# Altium PCB OTP5.PcbDoc
Units mil, origin at the board's own origin, x right, y up, seen from the top; angles counter-clockwise.
Board outline 1426.61 x 364.86 mil, 4 copper layers (Top Layer, Internal Plane 1, Internal Plane 2, Bottom Layer), stack 30.634 mil thick; 24 components, 20 nets, 110 pads, 19 vias.
Unrouted connection lines stored in the file: 1.
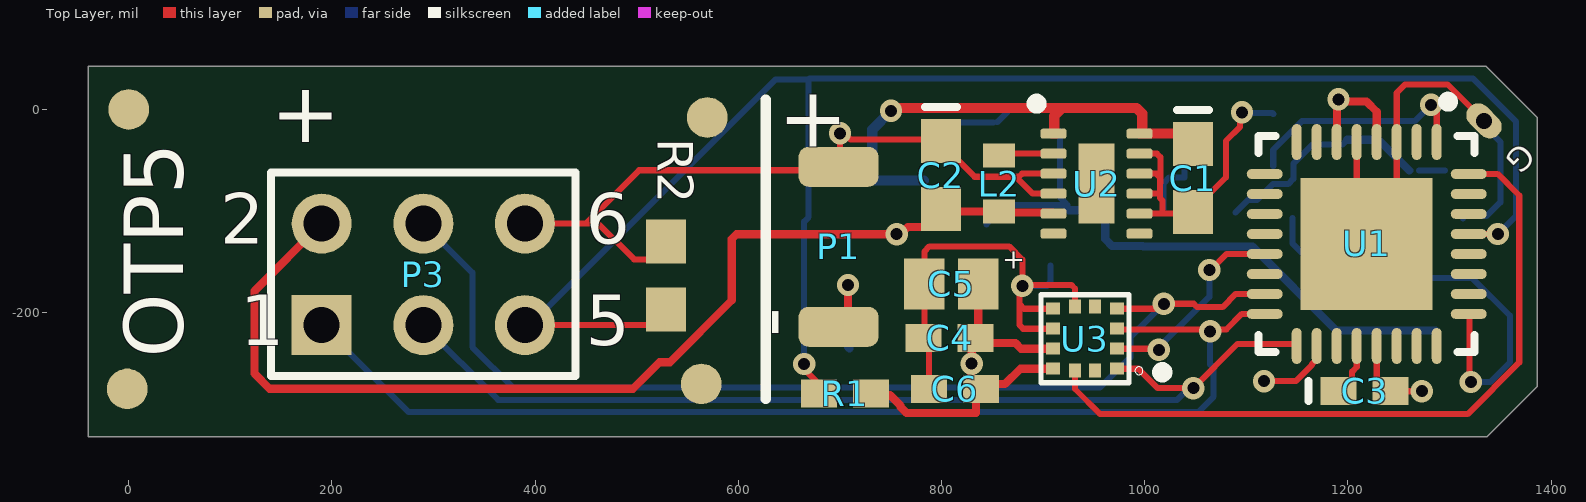
[diagram p0: Top Layer view]
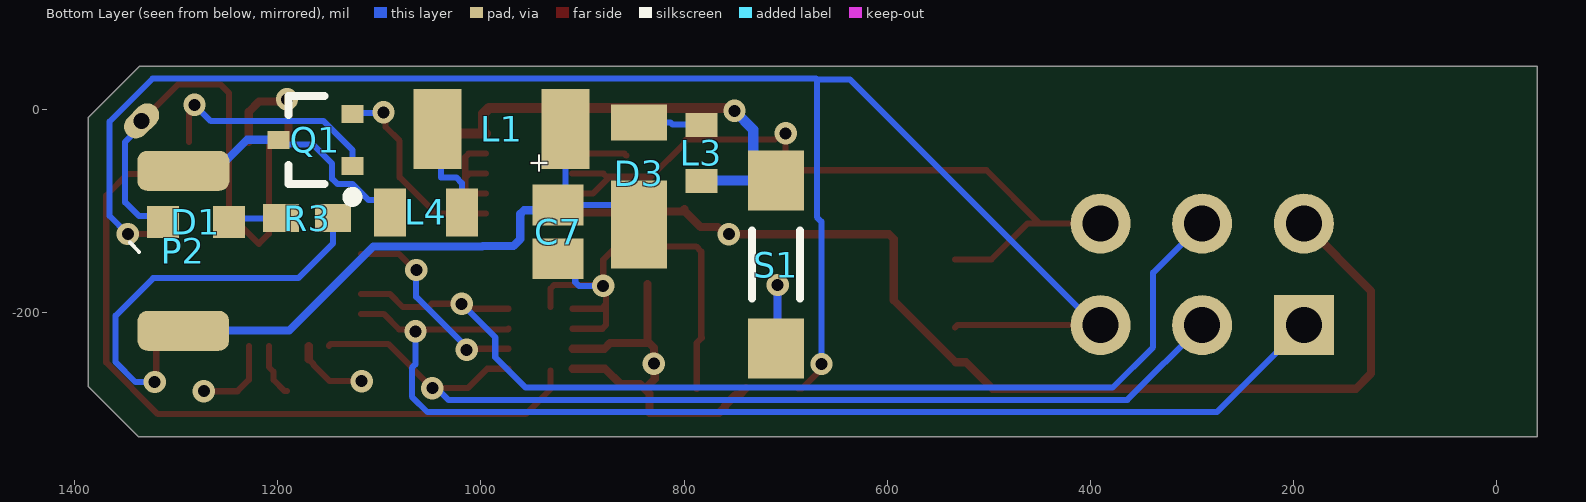
[diagram p1: Bottom Layer view, seen from below]
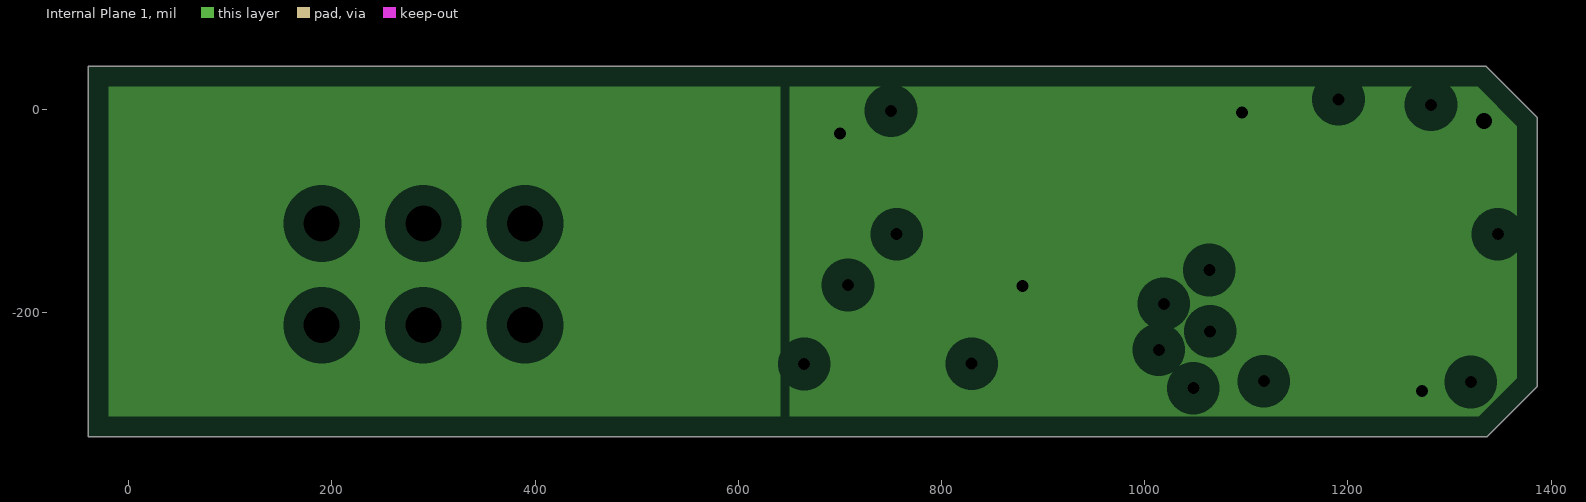
[diagram p2: Internal Plane 1, clearances drawn from the general rule]
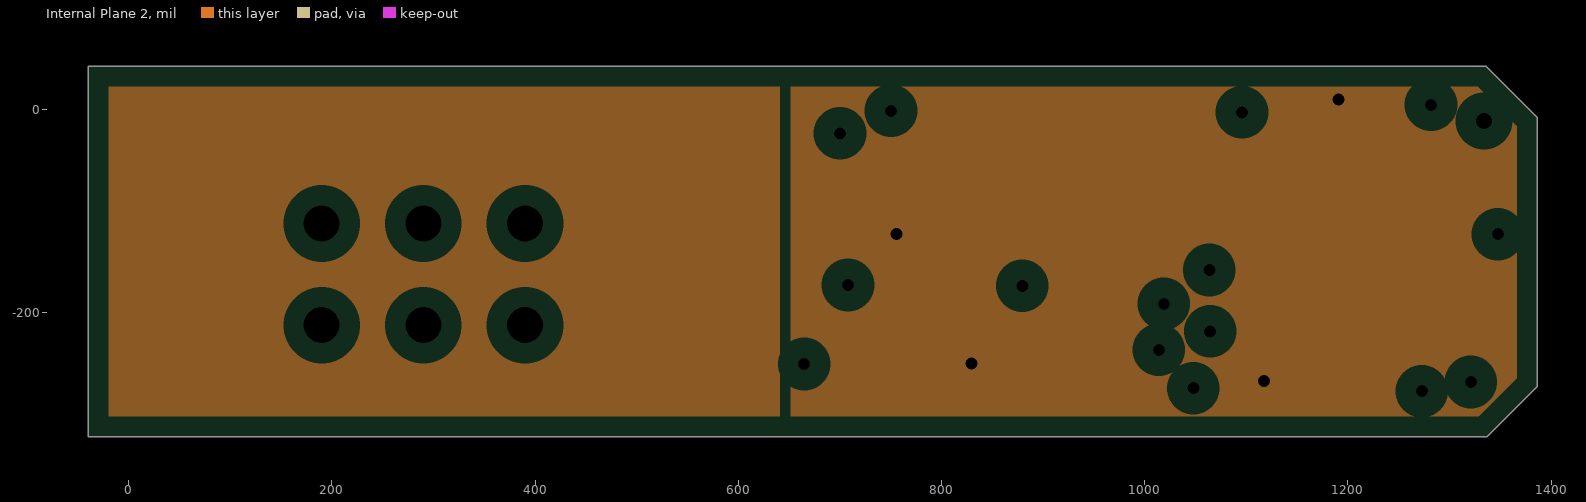
[diagram p3: Internal Plane 2, clearances drawn from the general rule]

## Layer stack, top to bottom
Top Solder: solder mask 0.4, Solder Resist, Dk 3.5
Top Layer: signal copper 1.4
Dielectric 1: core 10, FR-4, Dk 4.2
Internal Plane 1: plane copper 1.417, net GND
Dielectric 3: prepreg 5, Dk 4.2
Internal Plane 2: plane copper 1.417
Dielectric 2: core 10, Dk 4.2
Bottom Layer: signal copper 1.4
Bottom Solder: solder mask 0.4, Solder Resist, Dk 3.5

## Board outline
-40,-322.17 -40,42.69 1335.64,42.69 1386.6,-8.27 1386.6,-272.46 1337.9,-321.16 1336.71,-322.17

## Design rules (kind name [scope] priority, off if disabled: settings)
Clearance [All] p1: gap=6 ignorepadtopadclearanceinfootprint=FALSE
PlaneClearance [All] p1: clearance=20
PlaneConnect [All] p1: planeconnectstyle=Relief reliefexpansion=20 reliefentries=4 reliefconductorwidth=10 reliefairgap=10
PolygonConnect [All] p1: connectstyle=Relief reliefconductorwidth=10 reliefentries=4 polygonreliefangle="90 Angle" airgapwidth=10
RoutingVias [All] p1: holewidth=11 width=22 viastyle="Through Hole" minholewidth=8 minwidth=12 maxholewidth=28 maxwidth=50
SolderMaskExpansion [All] p1: expansion=4 istentingtop=FALSE
Width [All] p1: maxlimit=30 minlimit=6 preferedwidth=6
28 further rules are at their usual default settings.

## Components (designator, comment, footprint, x,y, rotation, side; value= is the part's Value field where it differs from the comment)
C1 "C0603" 0603 1047.51,-67.71 r270 top value=10uF
C2 "C0603" 0603 799.39,-64.62 r270 top value=10uF
C3 "0.1uF" 0402 1216.4,-277.05 r0 top
C4 "100nF" 0402 808.06,-224.75 r180 top value=100pF
C5 "10uF" Tant0805 809.6,-171.75 r0 top
C6 "100nF" 0402 813.1,-275.08 r180 top value=100pF
C7 "47uF" Tant0805 923.99,-120.57 r90 bottom value=10uF
D1 "LED_0603" Diode0603 1280.51,-110.82 r0 bottom
D3 "Shottky" DFLS130 844.27,-77.78 r90 bottom
L1 "100uH" Inductor_NLV32T 979.61,-19.39 r0 bottom
L2 "2.2uH" "Inductor KLZ1608AHR" 856.78,-73.01 r90 top
L3 "47uH" "Inductor KLZ1608AHR" 782.93,-42.82 r90 bottom
L4 "27uH" "Inductor MLZ2012M220WT000" 1054.03,-101.39 r0 bottom
P1 "PIEZO" PIEZO#1 698.63,-56.43 r180 top
P2 "PIEZO" PIEZO#2 1292.81,-217.91 r180 bottom
P3 "AVR SPI" HDR2X3 190,-212.31 r0 top
Q1 "PMF250XN,115" NXP-SOT323_N 1162.93,-30.04 r0 bottom
R1 "10k" 2-0402 704.97,-279.78 r0 top
R2 "omit" 3-0603 529.05,-163.44 r90 top
R3 "330" 2-0402 1171.03,-107.03 r180 bottom
S1 "Reed_MK24" "Reed MK24-B-3" 709.32,-152.67 r90 bottom
U1 "ATmega8-16AC" 32M1-A_M 1218.54,-132.36 r270 top
U2 "TPS62740" TPS6274x 910.27,-23.8 r0 top
U3 "LIS2DS12" LGA-12 972.71,-255.23 r180 top

## Footprints (in the part's own frame and the unit in brackets; to place one, negate y for a bottom-side part, rotate by r counter-clockwise, add the part's x,y. Pads: shape width x height; smd on the part's side, far side on the other; paste and mask are expansions set on the pad)
2-0402 [mm] "Chip Resistor; Body 1 x 0.5 mm (LxW typ)"
  rect 0.9x0.7 smd: 1(-0.65,0) 2(0.65,0)
3-0603 [mm] "Chip Resistor; Body 1.6 x 0.9 mm (LxW typ)"
  rect 1.1x1 smd: 1(-0.85,0) 2(0.85,0)
32M1-A_M [mm] "QFN, 32-Leads, Body 5x5mm, Pitch 0.5mm, Thermal Pad 3.3x3.3mm, IPC Low Density"
  oval 0.9x0.25 smd: 1(-2.55,1.75) 2(-2.55,1.25) 3(-2.55,0.75) 4(-2.55,0.25) 5(-2.55,-0.25) 6(-2.55,-0.75) 7(-2.55,-1.25) 8(-2.55,-1.75) 17(2.55,-1.75) 18(2.55,-1.25) 19(2.55,-0.75) 20(2.55,-0.25) 21(2.55,0.25) 22(2.55,0.75) 23(2.55,1.25) 24(2.55,1.75)
  oval 0.25x0.9 smd: 9(-1.75,-2.55) 10(-1.25,-2.55) 11(-0.75,-2.55) 12(-0.25,-2.55) 13(0.25,-2.55) 14(0.75,-2.55) 15(1.25,-2.55) 16(1.75,-2.55) 25(1.75,2.55) 26(1.25,2.55) 27(0.75,2.55) 28(0.25,2.55) 29(-0.25,2.55) 30(-0.75,2.55) 31(-1.25,2.55) 32(-1.75,2.55)
  rect 3.3x3.3 smd paste-1.2: 33(0,0)
  silkscreen extent -3.68,-2.7 2.7,2.7, body extent -2.55,-2.55 2.55,2.55, height 1
0402 [mm] "Chip Capacitor; Body 1.0 x 0.5 mm (LxW typ)"
  rect 0.9x0.7 smd: 1(-0.65,0) 2(0.65,0)
  silkscreen extent -1.4,-0.25 -1.4,0.25
0603 [mm] "Chip Capacitor; Body 1.6 x 0.8 mm (LxW typ)"
  rect 1.1x1 smd: 1(-0.85,0) 2(0.85,0)
  silkscreen extent -1.7,-0.4 -1.7,0.4
DFLS130 [mm] "Diode"
  rect 0.9x1.4 smd: A(1.65,0)
  rect 2.2x1.4 smd: K(-0.9,0)
Diode0603 [mm]
  rect 0.8x0.8 smd: A(-0.825,0) K(0.825,0)
  silkscreen extent 1.42,0.51 1.65,0.74
HDR2X3 [mm] "Connector; Header; 3x2 Position"
  rect 1.5x1.5 hole 0.9: 1(0,0)
  round 1.5 hole 0.9: 2(0,2.54) 3(2.54,0) 4(2.54,2.54) 5(5.08,0) 6(5.08,2.54)
  silkscreen extent -1.27,-1.27 6.35,3.81
"Inductor KLZ1608AHR" [mm]
  rect 0.6x0.8 smd: 1(-0.7,0) 2(0.7,0)
"Inductor MLZ2012M220WT000" [mm]
  rect 0.8x1.2 smd: 1(-0.9,0) 2(0.9,0)
Inductor_NLV32T [mm]
  rect 1.2x2 smd: 1(-1.6,0) 2(1.6,0)
LGA-12 [mm] "LIS2DS12"
  rect 0.35x0.3 smd: 1(0,0) 2(0,-0.5) 3(0,-1) 4(0,-1.5) 7(1.6,-1.5) 8(1.6,-1) 9(1.6,-0.5) 10(1.6,0)
  rect 0.3x0.35 smd: 5(0.55,-1.55) 6(1.05,-1.55) 11(1.05,0.05) 12(0.55,0.05)
  silkscreen extent -0.65,-1.85 1.9,0.35
NXP-SOT323_N [mm] "SOT23, 3-Leads, Body 2.2x1.35mm, Pitch 0.65mm, IPC Medium Density"
  rect 0.55x0.45 smd: 1(-0.925,0.65) 2(-0.925,-0.65) 3(0.925,0)
  silkscreen extent -1.05,-1.1 0.67,1.55, body extent -0.67,-1.1 0.67,1.1, height 1.1
PIEZO#1 [mm]
  rrect50% 2x1 smd: 1(0,0) 2(0,4)
PIEZO#2 [mm]
  rrect50% 2.286x1 smd: 1(0,0)
  rrect50% 2.305x1 smd: 2(0,4)
"Reed MK24-B-3" [mm] "Meder Reed Switch Surface Mount"
  rect 1.5x1.4 smd: 1(-2.1,0) 2(2.1,0)
  silkscreen extent -0.85,-0.6 0.85,0.6, body extent -2.75,-1.1 2.75,1.1, height 1.8
Tant0805 [mil]
  rect 40x50 smd: 1(-26.5,0) 2(26.5,0)
TPS6274x [mm] "QFN, 12-Leads, Body 2.00x3.00mm, Pitch 0.50mm, Thermal Pad 0.90x2.00mm, IPC Medium Density"
  rrect50% 0.65x0.25 smd: 1(0,0) 2(0,-0.5) 3(0,-1) 4(0,-1.5) 5(0,-2) 6(0,-2.5) 7(2.15,-2.5) 8(2.15,-2) 9(2.15,-1.5) 10(2.15,-1) 11(2.15,-0.5) 12(2.15,0)
  rect 0.9x2 smd paste-0.1: 13(1.075,-1.25)
  silkscreen extent -0.55,0.63 -0.3,0.87, body extent 0.03,-2.8 2.12,0.3, height 0.8

## Part data
C1 C2: "Ceramic Chip Capacitor - Standard", PackageDocument=Mar-2001, Code_IPC="1608 [0603]", Code_JEITA=0603, ComponentLink1Description="Manufacturer Link", ComponentLink1URL=http://www.kemet.com/, ComponentLink2Description=Datasheet, ComponentLink2URL=http://www.kemet.com/kemet/web/homepage/kechome.nsf/vapubfilesname/F3102TA.pdf/$file/F3102TA.pdf, DatasheetDocument=Mar-2001, LatestRevisionDate=19-Mar-2004, LatestRevisionNote="Silkscreen size reduced.", Note="Footprint corresponds to dimensions for bulk cassette packaging. This case size has tightened tolerances.", PackageReference=0603, Published=17-Jul-2002, Publisher="Altium Limited"
C3 C4 C6: library part C0402, "Ceramic Chip Capacitor - Standard", PackageDocument=Mar-2001, Code_IPC="1005 [0402]", Code_JEITA=0402, ComponentLink1Description="Manufacturer Link", ComponentLink1URL=http://www.kemet.com/, ComponentLink2Description=Datasheet, ComponentLink2URL=http://www.kemet.com/kemet/web/homepage/kechome.nsf/vapubfilesname/F3102TA.pdf/$file/F3102TA.pdf, DatasheetDocument=Mar-2001, LatestRevisionDate=19-Mar-2004, LatestRevisionNote="Silkscreen size reduced.", Note="Footprint corresponds to dimensions for bulk cassette packaging. This case size has tightened tolerances.", PackageReference=0402, Published=17-Jul-2002, Publisher="Altium Limited"
C5 C7: library part Tant0805
D3: library part DFLS130, Supplier Part Number 1=DFLS130LDITR-ND, Supplier 1=Digi-Key
L1: library part Inductor_NLV32T, Supplier Part Number 1=810-NLV32T-391J-EF, Supplier 1=Mouser
L2 L3: library part "Inductor KLZ1608", Supplier Part Number 1=810-KLZ1608AHR2R2WTD, Supplier 1=Mouser
L4: library part "Inductor MLZ2012M220WT000", Supplier Part Number 1=810-MLZ2012M220WT000, Supplier 1=Mouser
P3: library part "Header 3X2", "Header, 3-Pin, Dual row", LatestRevisionDate=17-Jul-2002, LatestRevisionNote="Re-released for DXP Platform.", Publisher="Altium Limited"
Q1: "N-Channel Trench MOSFET, 30 V, 0.9 A, -55 to 150 degC, 3-Pin SOT323, Tape and Reel", Manufacturer="NXP Semiconductors", Supplier Part Number 1=568-10784-2-ND, Channel Type=N, Ciss [typ] (pF)=50, Code_JEITA=SC-70, ComponentLink1Description="Manufacturer URL", ComponentLink1URL=http://www.nxp.com/, ComponentLink2Description=Datasheet, ComponentLink2URL=http://www.nxp.com/documents/data_sheet/PMF250XN.pdf, ComponentLink3Description="Package Specification", ComponentLink3URL=http://www.nxp.com/documents/outline_drawing/sot323_po.pdf, Coss [typ] (pF)=10, DatasheetVersion="Rev. 1", ID [max] (A)=0.9, Mounting Technology="Surface Mount", PackageDescription="3-Pin Small Outline Transistor Package, Body 2 x 1.25 mm, Pitch 0.65 mm", PackageReference=SOT323, PackageVersion="06-03-16, 03/2006", Packing="Tape & Reel", PartNumber=PMF250XN,115, Supplier 1=Digi-Key, Supplier 2=Digi-Key, Supplier 3=Digi-Key, Supplier 4=Mouser, Supplier Part Number 2=568-10784-1-ND, Supplier Part Number 3=568-10784-6-ND, Supplier Part Number 4=771-PMF250XN,115, VDS [max] (V)=30, VGSth [typ] (V)=1
R1 R3: library part ERJ2RB, "Precision Thick Film Chip Resistor, 10 Ohm to 1M Ohm Range, 1% and 0.5% Tolerance, 0402 Size, 0.063 W", PackageDocument=Mar-2003, Code_IPC="1005 [0402]", ComponentLink1Description="Manufacturer Link", ComponentLink1URL=http://www.panasonic.com/industrial/components/resistive_products.htm, ComponentLink2Description=Datasheet, ComponentLink2URL=http://www.panasonic.com/industrial/components/pdf/AOA0000CE2.pdf, LatestRevisionDate=19-Mar-2004, LatestRevisionNote="Silkscreen size reduced.", PackageReference=2-0402, Published=17-Dec-2003, Publisher="Altium Limited"
R2: library part ERJ3RK, "Precision Thick Film Chip Resistor, 10 Ohm to 1M Ohm Range, 1% and 0.5% Tolerance, 0603 Size, 0.063 W", PackageDocument=Mar-2003, Code_IPC="1608 [0603]", ComponentLink1Description="Manufacturer Link", ComponentLink1URL=http://www.panasonic.com/industrial/components/resistive_products.htm, ComponentLink2Description=Datasheet, ComponentLink2URL=http://www.panasonic.com/industrial/components/pdf/AOA0000CE2.pdf, LatestRevisionDate=19-Mar-2004, LatestRevisionNote="Silkscreen size reduced.", PackageReference=3-0603, Published=17-Dec-2003, Publisher="Altium Limited"
S1: Supplier Part Number 1=374-1075-2-ND, Supplier 1=Digi-Key
U1: "8-Bit AVR Microcontroller with 8K Bytes of In-System Programmable Flash Memory", Code_JEDEC=MS-026-ABA, ComponentLink1Description="Manufacturer Link", ComponentLink1URL=http://www.atmel.com, ComponentLink2Description=Datasheet, ComponentLink2URL=http://www.atmel.com/dyn/resources/prod_documents/doc2486.pdf, DatasheetVersion=2486H-AVR-09/02, LatestRevisionDate=13-Apr-2006, LatestRevisionNote="IPC-7351 Footprint Added.", PackageDescription="32-Pin Thin Quad Flat Pack 0.8 mm Pitch", PackageReference=32A, PackageVersion="revB, Oct-2001", Published=17-Sep-2003, Publisher="Altium Limited"
U2: library part TPS6274x, Supplier 1=Farnell
U3: Supplier Part Number 1=497-16261-2-ND, Supplier 1=Digi-Key

## Free pads (board coordinates)
  round 40 smd paste-20 mask+5: 0(-1.4,-275.06) 0(0,0) 0(563.63,-270.17) 0(569.5,-7.95)
  oval 39.37x23.62 hole 15.75 rot 135: 2(1333.95,-11.33)

## Via types
v1: diameter 22, hole 11.81, Top Layer to Bottom Layer, 19 vias

## Nets (pads, with @x,y where several pads share a name; then routed paths per layer and width w, separated by ;. In a path a pad name is that pad's centre, name@x,y a point inside that pad or via, vN(x,y) a via of type N, cw(c..) or ccw(c..) an arc to the next point about the centre after c; other vN are vias at no path point)
BAT: C1.1 L3.1 S1.2 U2.1 U2.12 | length 517.1
  Top Layer w10: v1(750.3,-1.45) 752.6,0.85 757.82,0.85 758.53,1.56 918.88,1.56 ; U2.1@908.7,-23.72 910.96,-23.72 910.96,-6.35 918.88,1.56 ; U2.1 U2.1@912.69,-23.8 ; U2.12 U2.12@997.51,-23.8 ; C1.1 1037.06,-23.8 U2.12@997.51,-23.8 ; 918.88,1.56 936.42,1.56 991.73,1.56 997.59,-4.3 997.59,-23.72 U2.12@997.51,-23.8
  Bottom Layer w10: S1.2 L3.1@782.54,-69.99 ; S1.2@714.24,-69.74 731.87,-52.11 731.87,-19.87 v1(750.3,-1.45)
CS: U1.13 U3.2 | length 202.1
  Top Layer w6: U3.2 1012.91,-235.54 v1(1013.99,-236.62) ; v1(1063.54,-158.05) 1064.88,-158.05 1080.73,-142.2 U1.13
  Bottom Layer w6: v1(1013.99,-236.62) 1013.99,-234.02 1063.64,-184.37 1063.64,-158.15 v1(1063.54,-158.05)
DTR: P3.5 R1.1 R2.1 U1.29 | length 1692.9
  Top Layer w6: P3.5 530.88,-212.31 R2.1@533.17,-214.61 ; v1@667.8,-258.53 683.72,-274.45 R1.1@687.66,-274.45 ; U1.29 1319.02,-122.6 1347.43,-122.6 v1(1347.51,-122.67)
  Bottom Layer w6: P3.5 394.89,-212.31 636.76,29.56 669.24,29.56 ; v1(664.74,-250.51) 664.74,-110.56 669.24,-106.06 669.24,29.56 ; v1(1347.51,-122.67) 1365.52,-104.66 1365.52,-11.93 1323.19,30.39 670.07,30.39 669.24,29.56
GND: C1.2 C2.1 C3.2 C4.2 C5.1 C6.2 C7.1 D1.K P1.1 P3.6 pad.2 Q1.2 R2.2 U1.3 U1.5 U1.21 U1.33 U2.3 U2.4 U2.8 U2.9 U2.10 U2.11 U3.6 U3.7 U3.8 | length 2159.7
  Top Layer w6: P3.6 449.86,-112.31 ; R2.2@533.17,-147.68 497.39,-147.68 462.02,-112.31 449.86,-112.31 ; C6.2 787.51,-229.8 C4.2 783.1,-224.11 C5.1 783.1,-139.88 788.15,-134.84 866.47,-134.84 879.56,-147.93 v1(879.56,-173.62) ; U3.8 880.36,-215.86 876.84,-212.34 876.84,-191.97 ; U3.7 881.04,-196.17 876.84,-191.97 ; U2.4 889.74,-82.85 873.15,-66.26 ; U2.3 879.35,-63.17 876.26,-66.26 873.15,-66.26 ; U3.6 931.38,-176.23 927.86,-172.71 880.47,-172.71 v1(879.56,-173.62) ; U2.8 1016.4,-102.54 ; U2.9 1013.9,-82.85 1014.96,-83.91 ; U2.10 1011.44,-63.17 1014.96,-66.68 1014.96,-72.65 ; U2.11 1011.86,-43.48 1015.38,-47 1015.38,-72.23 1014.96,-72.65 ; v1(1095.82,-2.91) 1093.83,-4.9 1093.83,-17.2 1080.02,-31.01 1080.02,-66.71 1047.51,-99.21 C1.2 1046.15,-102.54 1016.4,-102.54 ; U1.5 1208.7,-122.52 U1.33 1248.07,-102.83 U1.3 1248.07,16.21 1256.46,24.6 1298.02,24.6 pad.2 ; U1.21 1228.39,-266.27 C3.2@1239.17,-277.05 ; C3.2 C3.2@1239.17,-277.05 ; v1(1272.73,-277.36) 1239.48,-277.36 C3.2@1239.17,-277.05 ; 449.86,-112.31 502.31,-59.85 707.54,-59.85 700.06,-52.37 v1(700.06,-23.46) 704.39,-23.46 710.34,-29.41 797.64,-29.41 C2.1 799.39,-33.13 832.52,-66.26 873.15,-66.26 ; 876.84,-191.97 876.84,-176.34 v1(879.56,-173.62) ; 1014.96,-83.91 1014.96,-72.65 ; 1014.96,-83.91 1014.96,-87.14 1017.41,-89.59 1017.41,-101.52 1016.4,-102.54
  Bottom Layer w6: v1(879.56,-173.62) 903.58,-173.62 907.09,-170.11 C7.1@907.09,-153.85 ; v1@1095.17,-3.57 v1(1095.82,-2.91) 1096.59,-3.68 1125.74,-3.68 Q1.2 ; D1.K@1313.18,-107.22 1315.34,-105.06 1336.39,-105.06 1350.12,-91.33 1350.12,-43.7 1350.12,-31.96 1333.95,-15.79 pad.2
HVDD: C7.2 D3.K L1.1 P2.1 | length 588.8
  Bottom Layer w6: D3.K 863.42,-94.07 C7.2@920.26,-94.07 ; L1.1@916.63,-21.12 916.63,-86.7 922.12,-92.2 C7.2 ; C7.2@922.12,-95.93 C7.2@925.41,-99.22 ; 1105.2,-135.01 1105.92,-135.01
  Bottom Layer w8: C7.2@925.41,-99.22 957.65,-99.22 961.16,-102.74 961.16,-127.49 967.97,-134.3 998,-134.3 998.71,-135.01 1105.2,-135.01 ; 1105.92,-135.01 1188.56,-217.65 P2.1@1286.08,-217.65
INT1: U3.12
INT2: U1.32 U3.11 | length 709.3
  Top Layer w6: U3.11 931.38,-275.18 956.02,-299.82 1317.8,-299.82 1368.67,-248.96 1368.67,-84.73 1347.4,-63.46 U1.32
LED1: R3.2 U1.25 | length 428.5
  Top Layer w6: v1@1319.49,-266.81 U1.25@1319.49,-201.26
  Top Layer w10: v1@1319.49,-266.81 v1(1321.01,-268.34)
  Bottom Layer w6: R3.2 1145.44,-131.86 1179.53,-165.95 1322.51,-165.95 1359.54,-202.98 1359.54,-248.7 1339.91,-268.34 v1(1321.01,-268.34)
MISO: P3.1 U1.16 U3.3 | length 1137.3
  Top Layer w6: U3.3 973.47,-216.62 1080.36,-216.62 1095.71,-201.26 U1.16
  Bottom Layer w6: P3.1 275.56,-297.87 1052.52,-297.87 1067.8,-282.59 1067.8,-254.34 1064.39,-250.94 v1(1064.39,-218.36)
MOSI: P3.4 U1.15 U3.4 | length 1038.5
  Top Layer w6: U3.4 1009.61,-196.17 1014.49,-191.3 v1(1018.81,-191.3) 1048.29,-191.3 1051.48,-194.49 1076.63,-194.49 1089.55,-181.57 U1.15
  Bottom Layer w6: P3.4 338.33,-160.64 338.33,-233.89 378.3,-273.87 955.89,-273.87 985.82,-243.94 985.82,-224.29 v1(1018.81,-191.3)
NetC3_1: C3.1 U1.20 | length 53.2
  Top Layer w6: C3.1 1193.31,-277.05 1204.09,-266.27 1204.09,-258.1 1208.7,-253.49 U1.20
NetD1_A: D1.A R3.1 | length 56.1
  Bottom Layer w6: R3.1@1194.15,-105.97 R3.1@1195.57,-107.38 ; R3.1 1196.81,-107.22 D1.A@1248.22,-107.22 ; D1.A@1247.82,-118.86 1249.64,-118.86 D1.A@1250.09,-119.31
NetD3_A: D3.A L3.2 | length 84.1
  Bottom Layer w6: L3.2@785.58,-23.56 794.39,-14.75 811.48,-14.75 813.43,-12.8 D3.A@851.15,-12.8 ; D3.A@854.82,-12.54 D3.A@864.79,-2.57
NetL1_2: L1.2 L4.1 | length 98.9
  Bottom Layer w6: L4.1 1018.6,-72.44 1024.21,-66.83 1039.1,-66.83 1039.1,-24.63 L1.2@1042.61,-21.12
NetL2_2: L2.2 U2.2 | length 54.3
  Top Layer w6: L2.2 858.75,-43.48 U2.2
NetP1_2: P1.2 S1.1 | length 107.7
  Top Layer w8: P1.2@707.54,-217.33 707.92,-216.95 v1(707.92,-172.84)
  Bottom Layer w8: v1(707.92,-172.84) 707.92,-233.95 S1.1
PIEZO: L4.2 P2.2 Q1.3 | length 247.6
  Bottom Layer w6: L4.2 1101.91,-88.94 1110.7,-88.94 1126.15,-73.49 1141.07,-73.49 1146.34,-68.22 1146.34,-53.31 1165.29,-34.36 1194.8,-34.36 Q1.3@1199.35,-29.81 ; P2.2@1269.99,-59.98 P2.2@1295.68,-59.98
  Bottom Layer w8: Q1.3@1199.35,-29.81 1230.03,-29.81 P2.2@1260.39,-60.17
PWM: Q1.1 U1.1 | length 227.5
  Top Layer w6: v1@1281.93,3.7 1287.44,-1.81 U1.1
  Bottom Layer w6: Q1.1 1126.51,-39.77 1154.76,-11.51 1265.74,-11.51 v1(1281.85,4.6)
SCK: P3.3 U1.17 U3.1 | length 996.9
  Top Layer w6: U3.1 993.69,-255.23 1012.77,-274.31 v1(1047.8,-274.31) 1091.33,-230.77 1147.87,-230.77 1149.65,-232.55 U1.17
  Bottom Layer w6: P3.3 363.56,-285.87 1031.9,-285.87 1043.47,-274.31 v1(1047.8,-274.31)
V1.8: C2.2 C4.1 C5.2 C6.1 L2.1 P3.2 R1.2 U1.4 U1.6 U1.18 U2.5 U3.9 U3.10 | length 1662.7
  Top Layer w6: v1(1117.34,-267.43) 1148.87,-267.43 1164.57,-251.73 ; 1164.57,-250.81 U1.18@1169.33,-246.05
  Top Layer w8: P3.2 123.71,-178.6 123.71,-259.92 138.74,-274.95 496.48,-274.95 522.6,-248.83 532.61,-248.83 593.58,-187.85 593.58,-127.5 598.27,-122.81 v1(755.9,-122.81) ; R1.2@738.84,-274.45 745.55,-281.16 749.49,-281.16 759.8,-291.47 759.8,-293 765.65,-298.85 834.01,-298.85 834.01,-279.76 C6.1 843.46,-270.31 862.56,-270.31 877.64,-255.23 U3.10 ; v1@757.75,-124.79 766.8,-115.74 783.7,-115.74 799.39,-100.06 C2.2 801.87,-100.57 L2.1 857.83,-101.62 909.35,-101.62 U2.5 ; v1(829.72,-250.29) 829.5,-250.5 828.88,-250.5 828.88,-265.3 C6.1 ; v1@829.72,-249.66 829.72,-234.53 834.3,-229.95 872.7,-229.95 878.3,-235.54 U3.9 ; C4.1@836.1,-227.08 C5.2 ; U1.18@1169.33,-246.05 U1.18 ; U1.6 1189.37,-31.61 1189.37,8.6 v1(1190.76,9.99) 1193.04,7.71 1218.42,7.71 1228.39,-2.25 U1.4
pads on no net: U1.2 U1.7 U1.8 U1.9 U1.10 U1.11 U1.12 U1.14 U1.19 U1.22 U1.23 U1.24 U1.26 U1.27 U1.28 U1.30 U1.31 U2.6 U2.7 U2.13 U3.5

## Polygon pours and split planes (outlines as drawn)
no net on Internal Plane 1 (split plane): 641.98,-302.07 -19.91,-302.07 -19.91,22.59 641.98,22.59
GND on Internal Plane 1 (split plane): 1366.5,-16.6 1366.5,-264.13 1328.57,-302.07 650.32,-302.07 650.32,22.59 1327.31,22.59
no net on Internal Plane 2 (split plane): 641.11,-302.07 -19.91,-302.07 -19.91,22.59 641.11,22.59
V1.8 on Internal Plane 2 (split plane): 1366.5,-16.6 1366.5,-264.13 1328.57,-302.07 651.31,-302.07 651.31,22.59 1327.31,22.59

## Other copper
Internal Plane 1 (plane layer: these items are gaps in the copper):
  pour cut-out: 641.98,42.69 650.32,42.69 650.32,-307.64 650.32,-322.31 641.98,-322.31
Internal Plane 2 (plane layer: these items are gaps in the copper):
  lines w10: 646.21,-322.57 646.21,42.06

## Silkscreen, mask and mechanical layers (free items; w line width, h text height)
Top Overlay:
  circle w10: c1017.36,-258.69 r5
  lines w10: 627.05,-285.15 627.05,9.85
  text "G" at 1364.94,-25.74 h39.37 r225
  text "+" at 139.99,-32.31 h60
  text "+" at 639.49,-36.83 h60
  text "-" at 614.2,-194.68 h60 r270
  text "OTP5" at 72.97,-244.18 h100 r90
Mechanical 1:
  lines w10: 1336.71,-322.17 -40,-322.17 -40,42.69 1335.64,42.69 1386.6,-8.27 1386.6,-272.46 1337.9,-321.16

## Text inside footprints (layer, text, board x,y; h text height)
C5: Top Overlay "+" at 859.6,-156.75 h19.68
C7: Bottom Overlay "+" at 933.99,-64.34 h19.68 r270
P3: Top Overlay "1" at 110,-232.31 h50; Top Overlay "2" at 90,-132.31 h50; Top Overlay "5" at 450,-232.31 h50; Top Overlay "6" at 450,-132.31 h50